# Altium PCB PCB.PcbDoc
Units mm, origin at the board's own origin, x right, y up, seen from the top; angles counter-clockwise.
Board outline 104.7 x 73.4 mm, 2 copper layers (Top Layer, Bottom Layer); 70 components, 62 nets, 213 pads, 16 vias.
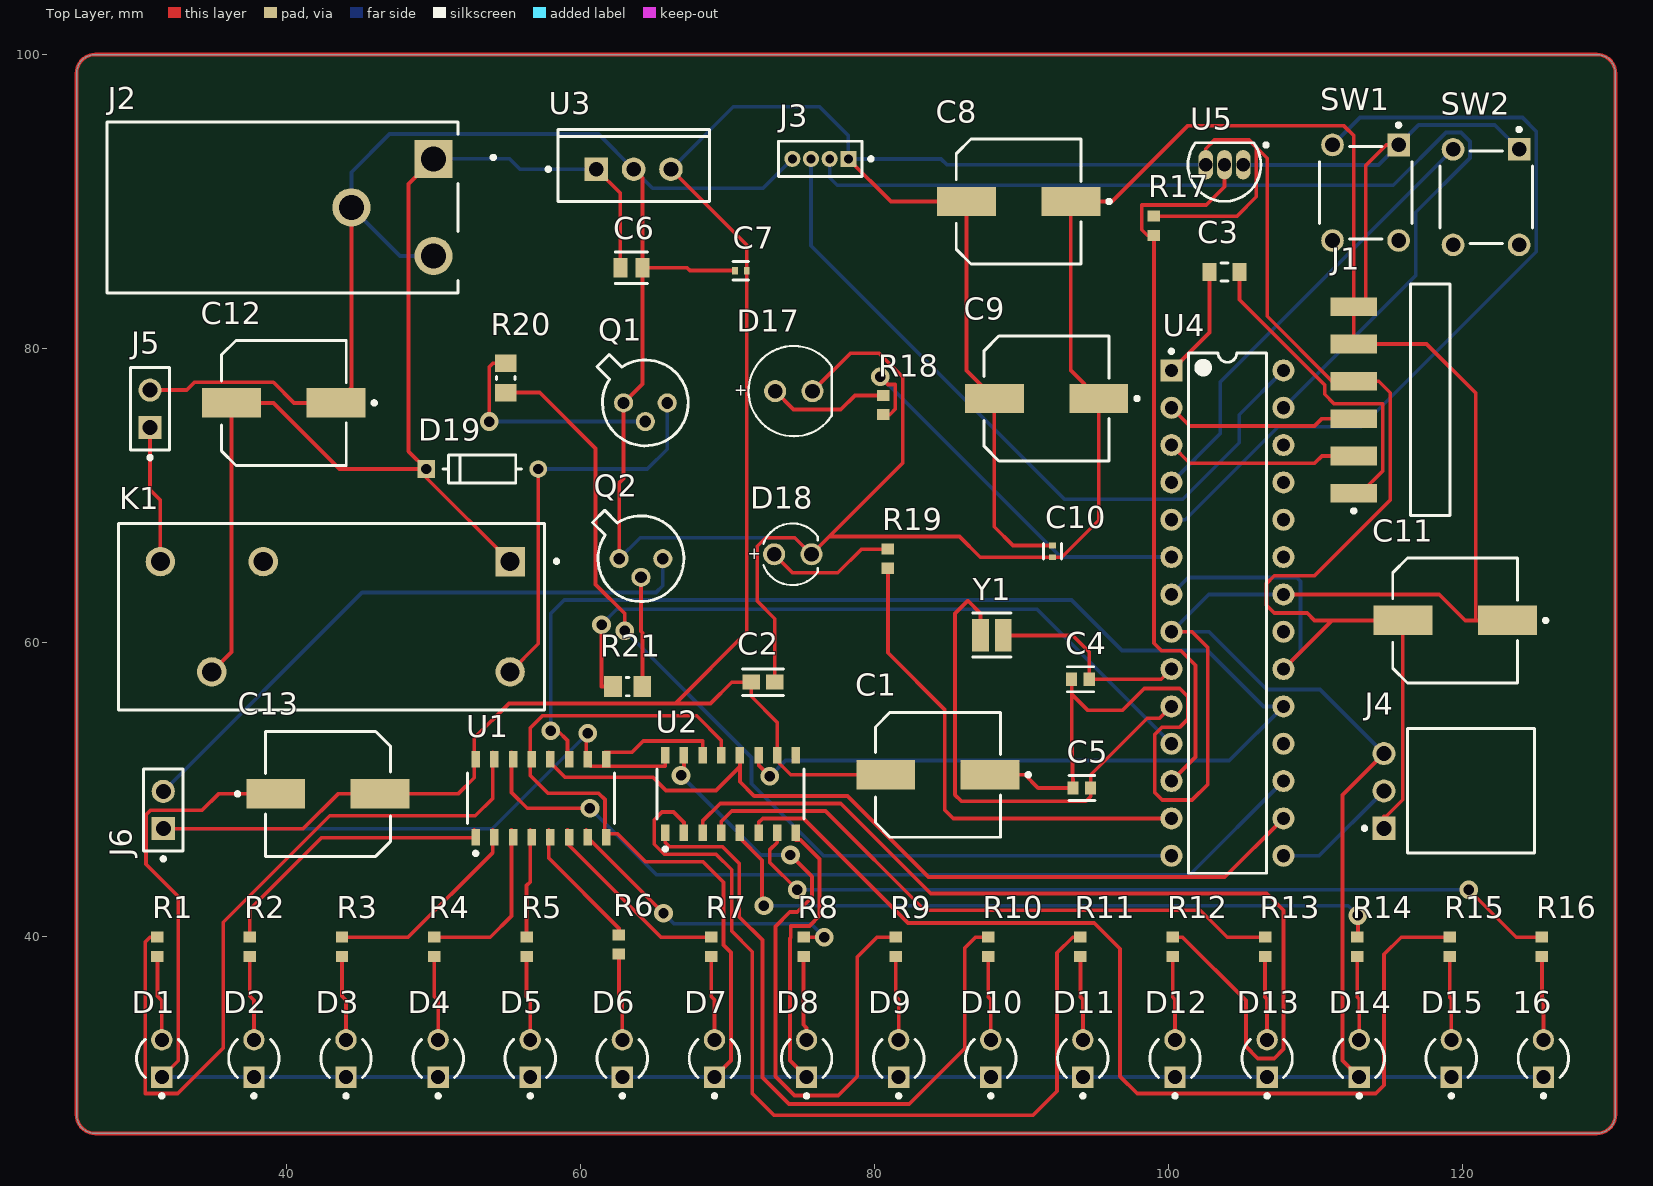
[diagram p0: Top Layer view]
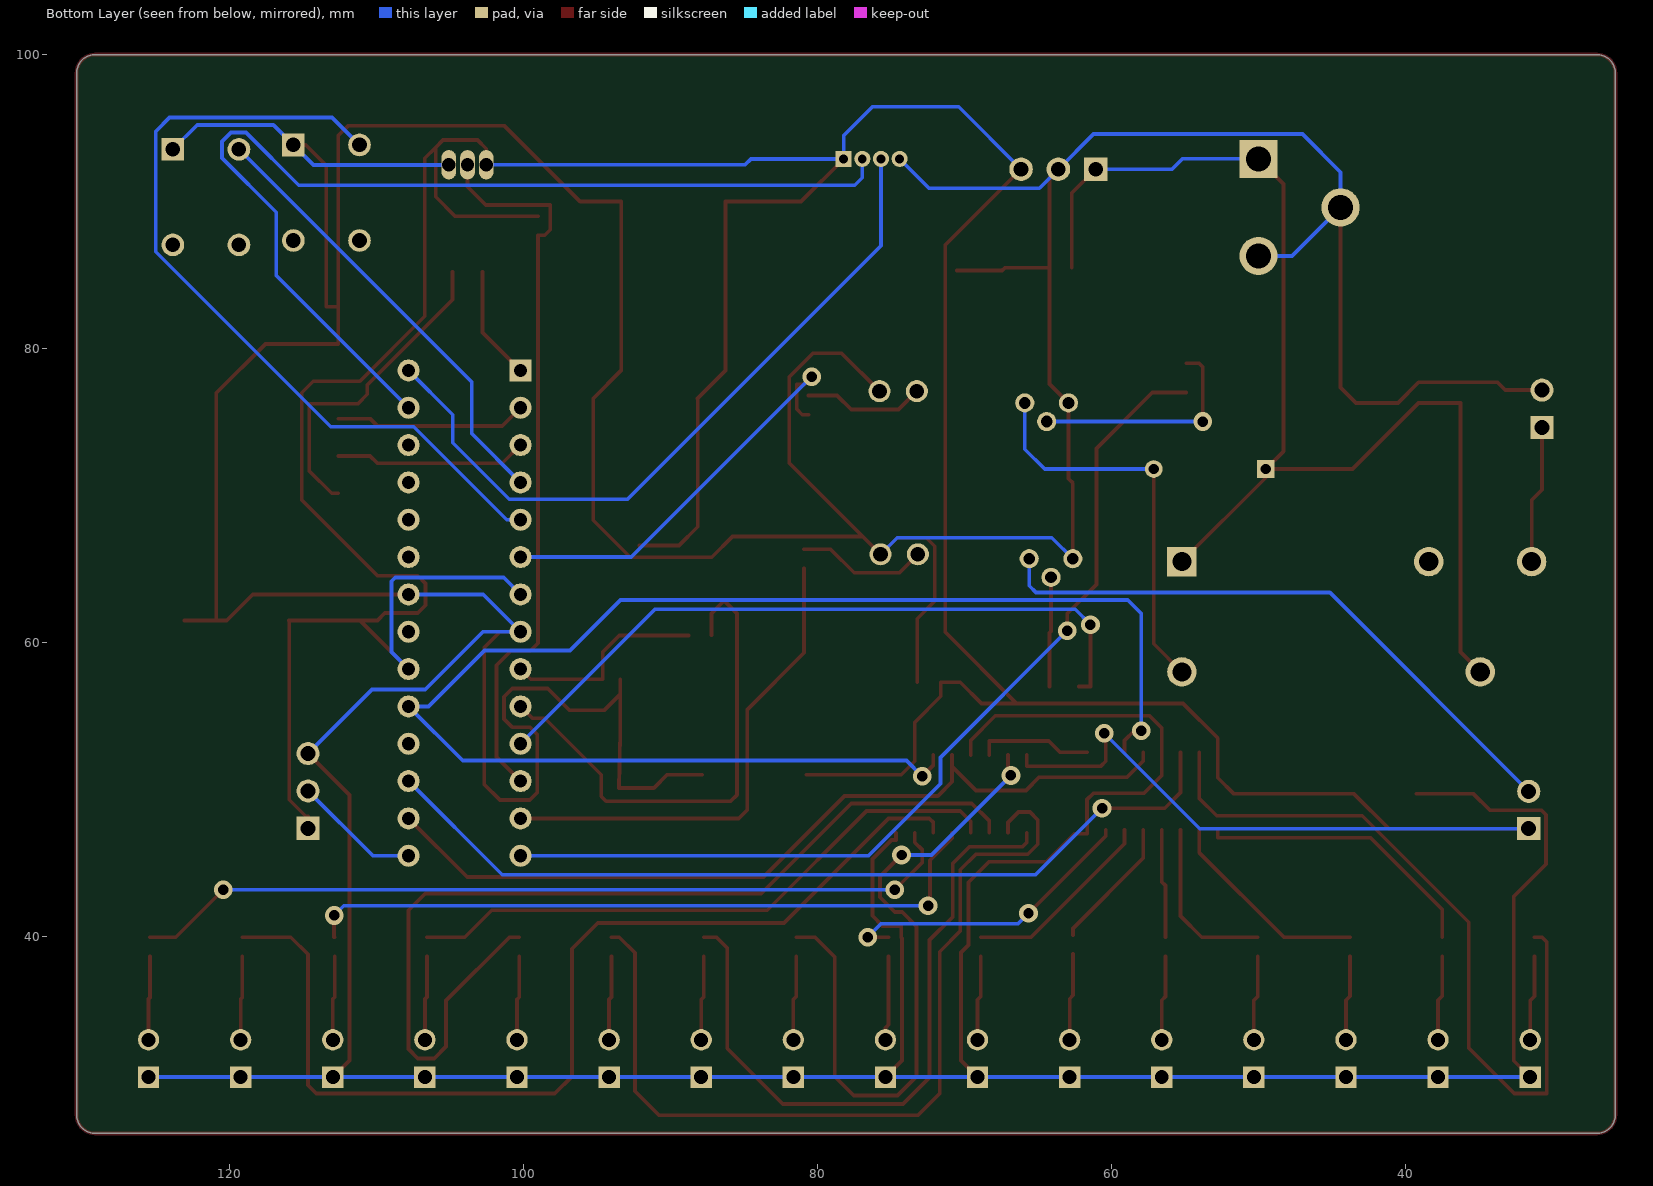
[diagram p1: Bottom Layer view, seen from below]
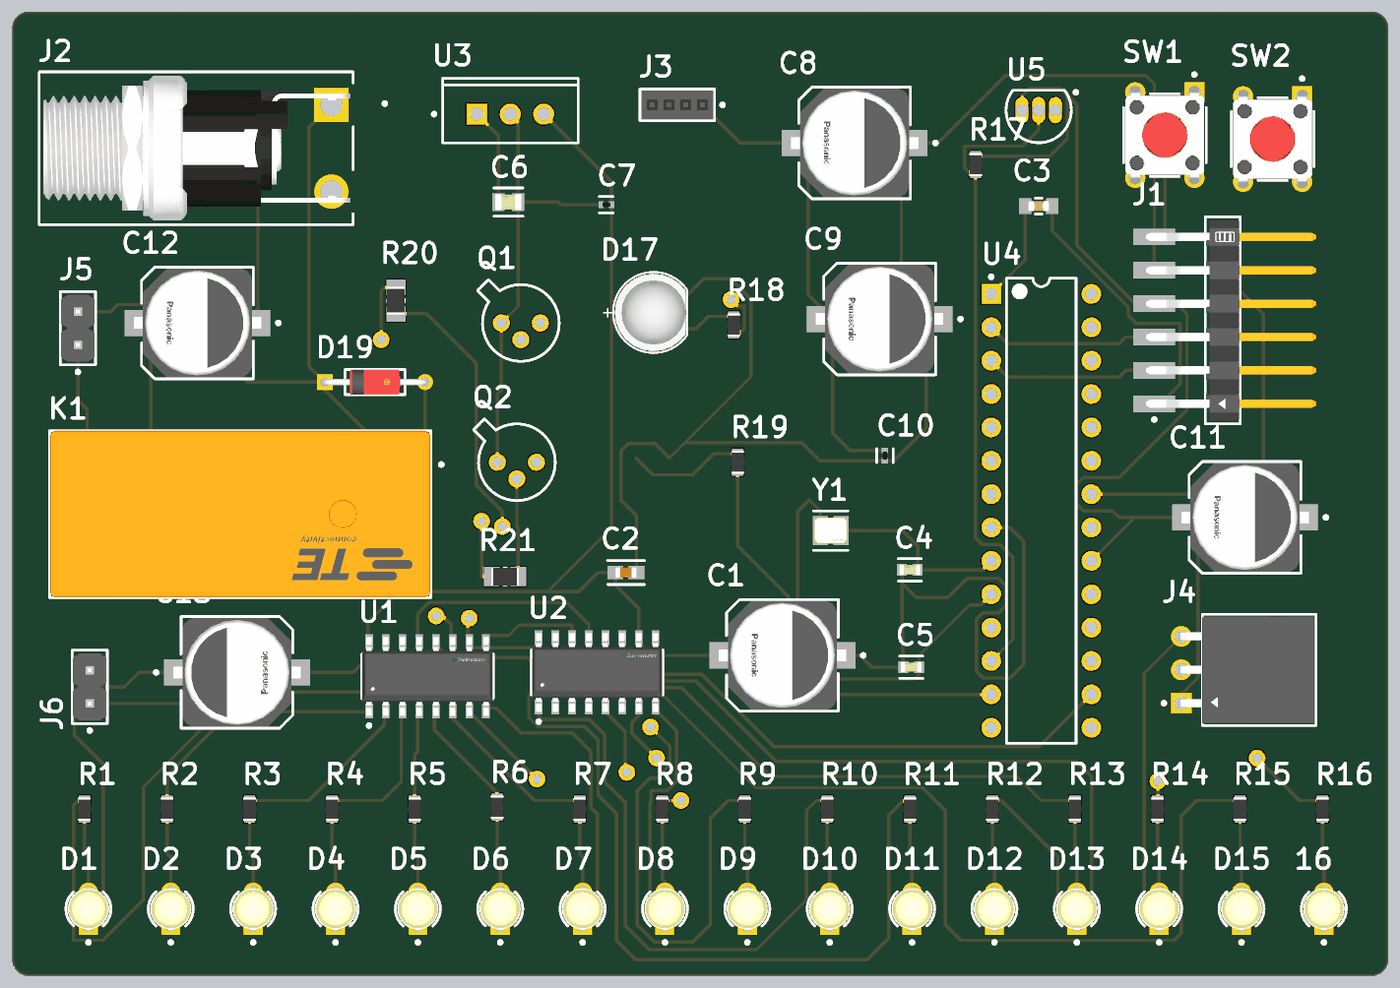
[diagram p2: 3D render of the assembled board from above, using the file's embedded part models]

## Layer stack, top to bottom
Top Solder: solder mask 0.0102, Solder Resist, Dk 3.5
Top Layer: signal copper 0.0356
Dielectric 1: dielectric 0.32, FR-4, Dk 4.8
Bottom Layer: signal copper 0.0356
Bottom Solder: solder mask 0.0102, Solder Resist, Dk 3.5

## Board outline
25.7,27.87 25.7,98.73 cw(c26.97,98.73) 26.97,100 129.13,100 cw(c129.13,98.73) 130.4,98.73 130.4,27.87 cw(c129.13,27.87) 129.13,26.6 26.97,26.6 cw(c26.97,27.87)

## Design rules (kind name [scope] priority, off if disabled: settings)
Clearance [All] p1: gap=0.254 ignorepadtopadclearanceinfootprint=FALSE
PolygonConnect [All] p1: connectstyle=Relief reliefconductorwidth=0.254 reliefentries=4 polygonreliefangle="90 Angle" airgapwidth=0.254
RoutingVias [All] p1: holewidth=0.711 width=1.27 viastyle="Through Hole" minholewidth=0.711 minwidth=1.27 maxholewidth=0.711 maxwidth=1.27
SolderMaskExpansion [All] p1: expansion=0.102 istentingtop=FALSE
SupplyNets "Schematic Supply Nets_3" [InNet('+5V_Main')] p1: voltage=0.000
SupplyNets "Schematic Supply Nets_2" [InNet('+12V_Cooler')] p2: voltage=0.000
SupplyNets "Schematic Supply Nets_1" [InNet('GND')] p3: voltage=0.000
Width [All] p1: maxlimit=0.254 minlimit=0.254 preferedwidth=0.254
30 further rules are at their usual default settings.

## Components (designator, comment, footprint, x,y, rotation, side; value= is the part's Value field where it differs from the comment)
16 "HLMP-1719" FP-HLMP-1719-MFG 125.5,31.7 r90 top
C1 "470uF" FP-FTF-MFG 84.3,51 r180 top
C2 "10uF" FP-GRM188-0_1-e0_2_0_55-IPC_A 72.402,57.3 r0 top
C3 "100nF" FP-CGA3E-0_3-0_1-IPC_A 103.8,85.2 r0 top
C4 "22pF" FP-C0603C-CF-MFG 94,57.5 r0 top value="22 pF"
C5 "22pF" FP-C0603C-CF-MFG 94.1,50.1 r0 top value="22 pF"
C6 "0.33uF" FP-C0805C-DN-MFG 63.45,85.5 r0 top value="0.33 μF"
C7 "0.1uF" FP-GRM15-MFG 70.9,85.3 r0 top value=0.10μF
C8 "470uF" FP-FTF-MFG 89.8,90 r180 top
C9 "470uF" FP-FTF-MFG 91.7,76.6 r180 top
C10 "0.1uF" FP-GRM15-MFG 92.1,66.2 r90 top value=0.10μF
C11 "470uF" FP-FTF-MFG 119.5,61.5 r180 top
C12 "470uF" FP-FTF-MFG 39.8,76.3 r180 top
C13 "470uF" FP-FTF-MFG 42.8,49.7 r0 top
D1 "HLMP-1719" FP-HLMP-1719-MFG 31.5,31.7 r90 top
D2 "HLMP-1719" FP-HLMP-1719-MFG 37.767,31.7 r90 top
D3 "HLMP-1719" FP-HLMP-1719-MFG 44.033,31.7 r90 top
D4 "HLMP-1719" FP-HLMP-1719-MFG 50.3,31.7 r90 top
D5 "HLMP-1719" FP-HLMP-1719-MFG 56.567,31.7 r90 top
D6 "HLMP-1719" FP-HLMP-1719-MFG 62.833,31.7 r90 top
D7 "HLMP-1719" FP-HLMP-1719-MFG 69.1,31.7 r90 top
D8 "HLMP-1719" FP-HLMP-1719-MFG 75.367,31.7 r90 top
D9 "HLMP-1719" FP-HLMP-1719-MFG 81.633,31.7 r90 top
D10 "HLMP-1719" FP-HLMP-1719-MFG 87.9,31.7 r90 top
D11 "HLMP-1719" FP-HLMP-1719-MFG 94.167,31.7 r90 top
D12 "HLMP-1719" FP-HLMP-1719-MFG 100.433,31.7 r90 top
D13 "HLMP-1719" FP-HLMP-1719-MFG 106.7,31.7 r90 top
D14 "HLMP-1719" FP-HLMP-1719-MFG 112.967,31.7 r90 top
D15 "HLMP-1719" FP-HLMP-1719-MFG 119.233,31.7 r90 top
D17 "151051BS04000" WL-TMRC_D5.9H8.7 74.5,77.1 r0 top
D18 "151031SS04000" WL-TMRC_D3.95H5.3 1344.43,1336 r0 top
D19 "1N4148" FP-017AG-MFG 53.3,71.8 r0 top
J1 "GBC06SBSN-M89" FP-GBC06SBSN-M89-MFG 117.8,76.5 r270 top
J2 "L722RA" FP-L722RA-MFG 39.7,89.6 r0 top
J3 "LPPB041NFFN-RC" FP-LPPB041NFFN-RC-MFG 76.305,92.9 r180 top
J4 "PPTC031LGBN-RC" FP-PPTC031LGBN-RC-MFG 120.5,49.9 r90 top
J5 "PEC02SABN" FP-PEC02SABN-MFG 30.7,75.9 r90 top
J6 "PEC02SABN" FP-PEC02SABN-MFG 31.6,48.6 r90 top
K1 "RTB14005" FP-RTB14005-MFG 43.05,61.75 r180 top
Q1 "2N2222" MLTC-TO-18-3 64.4,76.3 r0 top
Q2 "2N2222" MLTC-TO-18-3 64.1,65.7 r0 top
R1 "330" RESC1608X55X30LL15T15 31.2,39.3 r90 top
R2 "330" RESC1608X55X30LL15T15 37.48,39.3 r90 top
R3 "330" RESC1608X55X30LL15T15 43.76,39.3 r90 top
R4 "330" RESC1608X55X30LL15T15 50.04,39.3 r90 top
R5 "330" RESC1608X55X30LL15T15 56.32,39.3 r90 top
R6 "330" RESC1608X55X30LL15T15 62.6,39.45 r90 top
R7 "330" RESC1608X55X30LL15T15 68.88,39.3 r90 top
R8 "330" RESC1608X55X30LL15T15 75.16,39.3 r90 top
R9 "330" RESC1608X55X30LL15T15 81.44,39.3 r90 top
R10 "330" RESC1608X55X30LL15T15 87.72,39.3 r90 top
R11 "330" RESC1608X55X30LL15T15 94,39.3 r90 top
R12 "330" RESC1608X55X30LL15T15 100.28,39.3 r90 top
R13 "330" RESC1608X55X30LL15T15 106.56,39.3 r90 top
R14 "330" RESC1608X55X30LL15T15 112.84,39.3 r90 top
R15 "330" RESC1608X55X30LL15T15 119.12,39.3 r90 top
R16 "330" RESC1608X55X30LL15T15 125.4,39.3 r90 top
R17 "330" RESC1608X55X30LL15T15 99,88.35 r90 top
R18 "330" RESC1608X55X30LL15T15 80.6,76.15 r90 top
R19 "330" RESC1608X55X30LL15T15 80.9,65.7 r90 top
R20 "1k" RESC2013X60X35ML10T20 54.9,78 r90 top
R21 "1k" RESC2013X60X35ML10T20 63.2,57 r0 top
SW1 "1-1825910-5" FP-1-1825910-5-MFG 113.4,90.6 r0 top
SW2 "1-1825910-5" FP-1-1825910-5-MFG 121.6,90.3 r0 top
U1 "MC74HC595ADR2G" FP-751B-05-MFG 57.3,49.4 r90 top
U2 "MC74HC595ADR2G" FP-751B-05-MFG 70.2,49.7 r90 top
U3 "MC7805" ONSC-TO-220-3-221AB-01 63.6,92.2 r90 top
U4 "ATmega328P-PU" 28P3 104,62 r0 top
U5 "DS18B20" Q3+1 103.8,92.5 r90 top
Y1 "16MHz" FP-XRCHA-MFG 87.975,60.5 r0 top

## Footprints (in the part's own frame and the unit in brackets; to place one, negate y for a bottom-side part, rotate by r counter-clockwise, add the part's x,y. Pads: shape width x height; smd on the part's side, far side on the other; paste and mask are expansions set on the pad)
28P3 [mm] "28-Pin Plastic Dual In-Line Package (PDIP)"
  rect 1.5x1.5 hole 0.9: 1(-3.81,16.51)
  round 1.5 hole 0.9: 2(-3.81,13.97) 3(-3.81,11.43) 4(-3.81,8.89) 5(-3.81,6.35) 6(-3.81,3.81) 7(-3.81,1.27) 8(-3.81,-1.27) 9(-3.81,-3.81) 10(-3.81,-6.35) 11(-3.81,-8.89) 12(-3.81,-11.43) 13(-3.81,-13.97) 14(-3.81,-16.51) 15(3.81,-16.51) 16(3.81,-13.97) 17(3.81,-11.43) 18(3.81,-8.89) 19(3.81,-6.35) 20(3.81,-3.81) 21(3.81,-1.27) 22(3.81,1.27) 23(3.81,3.81) 24(3.81,6.35) 25(3.81,8.89) 26(3.81,11.43) 27(3.81,13.97) 28(3.81,16.51)
  silkscreen extent -3.93,-17.7 2.65,17.93, body extent -3.6,-17.65 3.6,17.65, height 4.58
FP-1-1825910-5-MFG [mm]
  rect 1.54x1.54 hole 0.99 paste-2539.97 mask+0: 1(2.25,3.25)
  round 1.54 hole 0.99 paste-2539.97 mask+0: 2(2.25,-3.25) 3(-2.25,3.25) 4(-2.25,-3.25)
  silkscreen extent -3.15,-3.15 3.15,4.72, body extent -3.24,-4.12 3.24,4.12, height 0.25
FP-017AG-MFG [mm]
  rect 1.2x1.2 hole 0.7 paste-2539.97 mask+0: 1(-3.813,0)
  round 1.2 hole 0.7 paste-2539.97 mask+0: 2(3.813,0)
  silkscreen extent -2.68,-0.95 2.68,0.95, body extent -4.51,-1.05 4.51,1.05, height 0.25
FP-751B-05-MFG [mm]
  rect 1.12x0.58 smd paste+0 mask+0: 1(-2.64,4.445) 2(-2.64,3.175) 3(-2.64,1.905) 4(-2.64,0.635) 5(-2.64,-0.635) 6(-2.64,-1.905) 7(-2.64,-3.175) 8(-2.64,-4.445) 9(2.64,-4.445) 10(2.64,-3.175) 11(2.64,-1.905) 12(2.64,-0.635) 13(2.64,0.635) 14(2.64,1.905) 15(2.64,3.175) 16(2.64,4.445)
  silkscreen extent -3.87,-5 1.7,5, body extent -3.3,-5.25 3.3,5.25, height 0.25
FP-C0603C-CF-MFG [mm]
  rect 0.75x0.9 smd paste+0 mask+0: 1(-0.6,0) 2(0.6,0)
  silkscreen extent -0.88,-0.85 0.88,0.85, body extent -1.2,-0.6 1.2,0.6, height 0.25
FP-C0805C-DN-MFG [mm]
  rect 0.95x1.35 smd paste+0 mask+0: 1(-0.75,0) 2(0.75,0)
  silkscreen extent -1.1,-1.08 1.1,1.07, body extent -1.4,-0.85 1.4,0.85, height 0.25
FP-CGA3E-0_3-0_1-IPC_A [mm]
  rect 0.956x1.206 smd paste+0 mask+0: 1(-1.025,0) 2(1.025,0)
  silkscreen extent -0.25,-0.6 0.25,0.6, body extent -2,-1.1 2,1.1, height 0.25
FP-FTF-MFG [mm]
  rect 4x2 smd paste+0 mask+0: 1(-3.55,0) 2(3.55,0)
  silkscreen extent -6.28,-4.25 4.25,4.25, body extent -5.8,-4.5 5.8,4.5, height 0.25
FP-GBC06SBSN-M89-MFG [mm]
  rect 1.27x3.18 smd paste+0 mask+0: 1(6.35,-5.205) 2(3.81,-5.205) 3(1.27,-5.205) 4(-1.27,-5.205) 5(-3.81,-5.205) 6(-6.35,-5.205)
  silkscreen extent -7.87,-5.33 7.87,1.33, body extent -7.98,-6.9 7.98,7.47, height 0.25
FP-GRM15-MFG [mm]
  rect 0.4x0.5 smd paste+0 mask+0: 1(-0.4,0) 2(0.4,0)
  silkscreen extent -0.52,-0.62 0.53,0.63, body extent -0.7,-0.38 0.7,0.38, height 0.25
FP-GRM188-0_1-e0_2_0_55-IPC_A [mm]
  rect 1.208x1.012 smd paste+0 mask+0: 1(-0.802,0) 2(0.802,0)
  silkscreen extent -1.41,-0.91 1.41,0.91, body extent -1.91,-1.01 1.91,1.01, height 0.25
FP-HLMP-1719-MFG [mm]
  rect 1.45x1.45 hole 0.95 paste-2539.97 mask+0: 1(-1.27,0)
  round 1.45 hole 0.95 paste-2539.97 mask+0: 2(1.27,0)
  silkscreen extent -2.67,-1.71 1.3,1.71, body extent -2.22,-2.22 2.22,2.22, height 0.25
FP-L722RA-MFG [mil]
  rect 102.43x102.43 hole 67 paste-99999 mask+0: 1(405,130)
  round 102.43 hole 67 paste-99999 mask+0: 2(185,0) 3(405,-130)
  silkscreen extent -470,-229 570,229, body extent -474,-229 474,229, height 10
FP-LPPB041NFFN-RC-MFG [mm]
  rect 1.1x1.1 hole 0.6 paste-2539.97 mask+0: 1(-1.905,0)
  round 1.1 hole 0.6 paste-2539.97 mask+0: 2(-0.635,0) 3(0.635,0) 4(1.905,0)
  silkscreen extent -3.57,-1.2 2.84,1.2, body extent -2.94,-1.3 2.94,1.3, height 0.25
FP-PEC02SABN-MFG [mm]
  rect 1.57x1.57 hole 1.02 paste-2539.97 mask+0: 1(-1.27,0)
  round 1.57 hole 1.02 paste-2539.97 mask+0: 2(1.27,0)
  silkscreen extent -3.45,-1.33 2.79,1.34, body extent -2.9,-1.44 2.9,1.44, height 0.25
FP-PPTC031LGBN-RC-MFG [mm]
  rect 1.57x1.57 hole 1.02 paste-2539.97 mask+0: 1(-2.54,5.85)
  round 1.57 hole 1.02 paste-2539.97 mask+0: 2(0,5.85) 3(2.54,5.85)
  silkscreen extent -4.24,-4.4 4.24,7.3, body extent -4.34,-4.5 4.34,6.74, height 0.25
FP-RTB14005-MFG [mm]
  round 2 hole 1.3 paste-2539.97 mask+0: 11(8.15,3.75) 12(4.65,-3.75) 14(11.65,-3.75) A2(-12.15,3.75)
  rect 2x2 hole 1.3 paste-2539.97 mask+0: A1(-12.15,-3.75)
  silkscreen extent -15.43,-6.35 14.5,6.35, body extent -14.6,-6.45 14.6,6.45, height 0.25
FP-XRCHA-MFG [mm]
  rect 1.15x2.2 smd paste+0 mask+0: 1(-0.775,0) 2(0.775,0)
  silkscreen extent -1.3,-1.5 1.3,1.5, body extent -1.45,-1.2 1.45,1.2, height 0.25
MLTC-TO-18-3 [mm] "TO-18, 3-Leads"
  round 1.3 hole 0.8: 1(-1.485,0) 2(0,-1.27) 3(1.485,0)
  silkscreen extent -3.29,-2.92 2.92,3.29, body extent -3.29,-2.93 2.93,3.29, height 5.33
ONSC-TO-220-3-221AB-01 [mm] "FM, 3-Leads, Body 10.3x4.85mm, Pitch 2.54mm"
  rect 1.6x1.6 hole 1: 1(0,2.54)
  round 1.6 hole 1: 2(0,0) 3(0,-2.54)
  silkscreen extent -2.18,-5.15 2.72,5.92, body extent -2.16,-5.15 2.69,5.15, height 19.68
Q3+1 [mm] "TO, Flat Index; 3 In-Line, Axial Leads; Body Dia. 4.7mm; Leads 0.56 x 0.51 mm (max)"
  oval 2x1 hole 0.9: 1(0,-1.27) 2(0,0) 3(0,1.27)
  silkscreen extent -2.48,-2.96 1.5,2.48, body extent -2.48,-2.5 1.5,2.5, height 4.96
RESC1608X55X30LL15T15 [mm] "Chip Resistor, 2-Leads, Body 1.75x0.95mm, IPC High Density"
  rect 0.75x0.85 smd: 1(-0.65,0) 2(0.65,0)
  body extent -0.87,-0.48 0.87,0.48, height 0.55
RESC2013X60X35ML10T20 [mm] "Chip Resistor, 2-Leads, Body 2.1x1.35mm, IPC Low Density"
  rect 1.2x1.45 smd: 1(-1,0) 2(1,0)
  silkscreen extent -0.1,-0.63 0.1,0.62, body extent -1.05,-0.68 1.05,0.67, height 0.6
WL-TMRC_D3.95H5.3 [mm] "THT Mono-color Round Color LED, 2-leads"
  round 1.5 hole 1: 1(-1271.27,-1270) 2(-1268.73,-1270)
  silkscreen extent -1272,-1272.1 -1268.31,-1267.9, body extent -1271.99,-1271.97 -1268.37,-1268.03, height 5.35
WL-TMRC_D5.9H8.7 [mm] "THT Mono-color Round Color LED, 2-leads"
  round 1.5 hole 1: 1(-1.27,0) 2(1.27,0)
  silkscreen extent -3.07,-3.07 2.58,3.08, body extent -2.95,-2.95 2.45,2.95, height 9.2

## Part data
16 D1 D2 D3 D4 D5 D6 D7 D8 D9 D10 D11 D12 D13 D14 D15: library part CMP-2000-06410-2, "LED YELLOW DIFFUSED T-1 T/H", Colour=Yellow, Forward Current=2mA, Forward Voltage=1.8V, Manufacturer=Broadcom, Package=0, Power Dissipation=17.5mW, Reverse Voltage=5V, Temperature="-40°C to +100°C", Temperature Range High=+100°C, Temperature Range Low=-40°C, Automotive=No, Category=Diode, ComponentLink2Description=Datasheet, ComponentLink2URL=https://docs.broadcom.com/docs/AV02-1557EN, Device Class L1=Optoelectronics, Device Class L2=LEDs, Device Class L3=unset, Digikey Description="LED YELLOW DIFFUSED T-1 T/H", Lead Free=Yes, Led Orientation=Straight, Luminous Intensity=2.1mcd, Manufacturer Part Number=HLMP-1719, Mouser Description="Standard LEDs - Through Hole Yellow Diffused 585nm 2.1mcd", Octopart=https://octopart.com/hlmp-1719-broadcom-71130405, RoHS=TRUE, Viewing Angle=50°, Wavelength=585nm
C1 C8 C9 C11 C12 C13: library part CMP-05427-000040-1, "CAP ALUM 470UF 20% 25V SMD", Case/Package=Radial, Dielectric Material=Aluminium, ESR (Equivalent Series Resistance)=80mR, Leakage Current=117.5uA, Max Operating Temperature=105°C, Min Operating Temperature=-55°C, Package Quantity=500, Ripple Current=850mA, Tolerance=20%, Voltage=25V, Capacitance=470uF, Construction=Cylindrical, Contact Plating=Tin, Diameter=8mm, Features="General Purpose", Height=10.2mm, Height - Seated (Max)=0.413inch, Lead Diameter=0.9mm, Lead Free="Lead Free", Lead Pitch=3.1mm, Length=10.2mm, Life (Hours)=2000Hour, Mount="Surface Mount", Number of Pins=2, Packaging="Tape and Reel", Radiation Hardening=No, REACH SVHC="No SVHC", Ripple Current (AC)=850mA, RoHS Compliant=Yes, Series=FT, Termination=SMD/SMT, Voltage Rating=25V, Voltage Rating (DC)=25V
C2: library part CMP-2006-02792-2, "Chip Multilayer Ceramic Capacitors for General Purpose, 0603, 10uF, X5R, 15%, 20%, 6.3V", Case Code (Imperial)=0603, Case Code (Metric)=1608, Dielectric=X5R, Max Operating Temperature=85°C, Min Operating Temperature=-55°C, Package Quantity=4000, Tolerance=20%, Voltage=6.3V, Capacitance=10uF, Case/Package=0603, Depth=0.8mm, Height=0.8mm, Lead Free="Lead Free", Length=1.6mm, Material=Ceramic, Mount="Surface Mount", Packaging="Tape and Reel", Radiation Hardening=No, REACH SVHC="No SVHC", Termination=SMD/SMT, Thickness=0.035inch, Voltage Rating=6.3V, Voltage Rating (DC)=6.3V, Width=0.031inch
C3: library part CMP-2000-07546-2, "Cap Ceramic 100nF 50V X7R 10% Pad SMD 0603 +125°C Automotive T/R", Case Code (Imperial)=0603, Case Code (Metric)=1608, Dielectric=X7R, Max Operating Temperature=125°C, Min Operating Temperature=-55°C, Package Quantity=1, Ratings=AEC-Q200, Tolerance=10%, Voltage=50V, Capacitance=100nF, Case/Package=0603, Composition=Ceramic, Depth=0.8mm, Height=0.8mm, Lead Free="Lead Free", Length=1.6mm, Mount="Surface Mount", Packaging="Tape and Reel", Radiation Hardening=No, REACH SVHC="No SVHC", Termination=SMD/SMT, Thickness=0.035inch, Voltage Rating=50V, Voltage Rating (DC)=50V, Weight=7.1E-05oz, Width=0.8mm
C4 C5: library part CMP-2006-03119-3, "Cap Ceramic 22pF 50V C0G 5% SMD 0603 125°C Paper T/R", Capacitance="22 pF", Manufacturer=KEMET, Manufacturer Part Number=C0603C220J5GACTU, Package=C0603C-CF, Temperature="-55°C to +125°C", Temperature Characteristic=C0G, Temperature Coefficient=30ppm/°C, Temperature Range High=+125°C, Temperature Range Low=-55°C, Tolerance=0.05, Voltage Rating="50 V", Automotive=Yes, Automotive Grade="Grade 1", Category=Cap, ComponentLink2Description=Datasheet, ComponentLink2URL=https://api.kemet.com/component-edge/download/datasheet/C0603C100J5GACAUTO.pdf, Device Class L1="Passive Components", Device Class L2=Capacitors, Device Class L3="Ceramic Capacitors", Digikey Description="Cap Ceramic 22pF 50V C0G 5% SMD 0603 125°C Paper T/R", Height=0.87mm, Lead Free=Yes, Material=Ceramic, Mouser Description="Cap Ceramic 22pF 50V C0G 5% SMD 0603 125°C Paper T/R", Octopart=https://octopart.com/c0603c220j5gactu-kemet-98525, RoHS=TRUE
C6: library part CMP-1036-04607-3, "CAP CER 0.33UF 50V X7R 0805", Capacitance="0.33 μF", Manufacturer=KEMET, Manufacturer Part Number=C0805C334K5RACTU, Package=C0805C-DN, Temperature="-55°C to +125°C", Temperature Characteristic=X7R, Temperature Coefficient=30ppm/°C, Temperature Range High=+125°C, Temperature Range Low=-55°C, Tolerance=0.1, Voltage Rating="50 V", Automotive=No, Category=Cap, ComponentLink2Description=Datasheet, ComponentLink2URL=https://content.kemet.com/datasheets/KEM_C1003_C0G_SMD.pdf, Device Class L1="Passive Components", Device Class L2=Capacitors, Device Class L3="Ceramic Capacitors", Digikey Description="CAP CER 0.33UF 50V X7R 0805", Height=0.88mm, Ipc Land Pattern Name=CAPC200125X78, Lead Free=Yes, Material=Ceramic, Mouser Description="Multilayer Ceramic Capacitors MLCC - SMD/SMT 50volts 0.33uF 10% X7R", Octopart=https://octopart.com/c0805c334k5ractu-kemet-10475704, RoHS=TRUE
C7 C10: library part CMP-2100-03641-2, "CAP CER 0.1UF 16V X7R 0402", Capacitance=0.10μF, Manufacturer=Murata, Manufacturer Part Number=GRM155R71C104KA88D, Package=GRM15, Temperature="-55°C to +125°C", Temperature Characteristic=X7R, Temperature Range High=+125°C, Temperature Range Low=-55°C, Tolerance=10%, Voltage Rating=16Vdc, Category=Cap, ComponentLink2Description=Datasheet, ComponentLink2URL=https://search.murata.co.jp/Ceramy/image/img/A01X/G101/ENG/GRM155R71H471KA01-01A.pdf, Device Class L1="Passive Components", Device Class L2=Capacitors, Device Class L3="Ceramic Capacitors", Digikey Description="CAP CER 0.1UF 16V X7R 0402", Height=0.55mm, Ipc Land Pattern Name=CAPC10050X219, Lead Free=yes, Material=Ceramic, Mouser Description="0402 0.1 uF 16V ±10 % Tolerance X7R SMT Multilayer Ceramic Capacitor", Octopart=https://octopart.com/grm155r71c104ka88d-murata-196880, RoHS=TRUE, Standoff Height=0mm
D17: library part CMP-1488-00009-2, Case/Package=Radial, Color=Blue, Forward Current=100mA, Forward Voltage=3.2V, Max Operating Temperature=85°C, Max Reverse Voltage (DC)=5V, Min Operating Temperature=-40°C, Test Current=20mA, Dominant Wavelength=470nm, Height=8.6mm, Length=5mm, Lens Size=5mm, Lens Style="Circular, Diffused, Round", Luminous Intensity=500mcd, Mount="Through Hole", NexarPartId=29717812, Packaging=Bulk, Peak Wavelength=465nm, REACH SVHC=Unknown, RoHS=Compliant, Viewing Angle=40°, Wavelength=470nm, Width=5mm
D18: library part CMP-1488-00005-2, Case/Package=Radial, Color=Red, Forward Current=100mA, Forward Voltage=2V, Max Operating Temperature=85°C, Max Reverse Voltage (DC)=5V, Min Operating Temperature=-40°C, Test Current=20mA, Dominant Wavelength=635nm, Height=5.3mm, Length=3mm, Lens Size=3mm, Lens Style="Circular, Diffused, Round", Luminous Intensity=160mcd, Mount="Through Hole", NexarPartId=29717802, Packaging=Bulk, Peak Wavelength=640nm, REACH SVHC=Unknown, RoHS=Compliant, Viewing Angle=40°, Wavelength=635nm, Width=3mm
D19: library part CMP-07163-000046-1, "DIODE GEN PURP 100V 200MA DO35", Average Rectified Current=200mA, Capacitance=4pF, Case/Package=DO-35, Current=4A, Forward Current=300mA, Forward Voltage=1V, Max Forward Surge Current (Ifsm)=1A, Max Operating Temperature=175°C, Max Power Dissipation=500mW, Max Repetitive Reverse Voltage (Vrrm)=100V, Max Reverse Current=5uA, Min Operating Temperature=-65°C, Package Quantity=2000, Contact Plating=Tin, Current Rating=200mA, Diameter=1.91mm, Element Configuration=Single, Height=4.56mm, Lead Free="Lead Free", Length=4.56mm, Max Reverse Voltage (DC)=100V, Max Surge Current=4A, Mount="Through Hole", Number of Pins=2, Output Current=200mA, Outside Diameter=1.85mm, Packaging=Bulk, Peak Non-Repetitive Surge Current=4A, Polarity=Standard, Power Dissipation=500mW, Radiation Hardening=No, REACH SVHC="No SVHC", Recovery Time=4ns, Reverse Recovery Time=4ns, Reverse Voltage=100V, Series=-, Voltage=100V, Voltage Rating (DC)=100V, Weight=0.01lb, Width=1.91mm
J1: library part CMP-25680-000080-1, "CONN HEADER SMD R/A 6POS 2.54MM", Color=Black, Package Quantity=1, Connector Type="Male Pin", Contact Material=Bronze, Contact Mating Length=0.23inch, Contact Plating=Gold, Contact Type="Male Pin", Gender=Male, Height=3.56mm, Housing Color=Black, Housing Material=Plastic, Lead Free="Lead Free", Length=15.2mm, Mount="Surface Mount", Number of Contacts=6, Number of Positions=6, Number of Rows=1, Packaging=Bulk, Pitch=0.1inch, RoHS Compliant=Yes, Termination=Solder, Width=2.54mm
J2: library part CMP-47995-000001-1, "CONN POWER JACK 2.1MM ID SOLDER", Current Rating=5A, Manufacturer=Switchcraft, Voltage Rating=12V, Automotive=No, Category=Conn, ComponentLink2Description=Datasheet, ComponentLink2URL=http://www.switchcraft.com/Drawings/7__RA_SERIES-7__RAH_SERIES_CD.PDF, Conn Gender=Male, Conn Orientation="Right Angle", Contact Material=Silver, Device Class L1=Connectors, Device Class L2="Power Connectors", Device Class L3=unset, Digikey Description="CONN POWER JACK 2.1MM ID SOLDER", Height=0.57inch, Lead Free=Yes, Manufacturer Part Number=L722RA, Mouser Description="DC Power Connectors R/A PC TERMINALS LONG BUSHING", Number of Contacts=3, Octopart=https://octopart.com/l722ra-switchcraft-28281, Package=L722RA, Pitch=3.302mm, RoHS=TRUE, Shielding=true
J3: library part CMP-25680-000035-1, "CONN HDR 4POS 0.05 GOLD PCB", Package Quantity=1, Connector Type=Header, Contact Plating=Gold, Contact Type="Female Socket", Lead Free="Lead Free", Mount="Through Hole", Number of Positions=4, Number of Rows=1, Packaging=Bulk, Pitch=0.05inch, RoHS Compliant=Yes, Termination=Solder
J4: library part CMP-00595-00270343-2, "PPTC031LGBN-RC Fixed Resistor, Metal Film, 1W, 10000ohm, 350V, 5% +/-Tol, 250ppm/Cel, Through Hole Mount", Color=Black, Current Rating=3A, Max Operating Temperature=105°C, Min Operating Temperature=-40°C, Connector Type="Header, Socket", Contact Material=Bronze, Contact Plating=Tin, Gender=Female, Height=2.4mm, Housing Color=Black, Housing Material=Plastic, Lead Free="Lead Free", Length=8.12mm, Mount="Through Hole", NexarPartId=270343, Number of Positions=3, Number of Rows=1, Packaging=Bulk, Pitch=2.54mm, RoHS=Compliant, Termination=Solder, Width=8.5mm
J5 J6: library part CMP-25680-000076-1, "CONN HEADER VERT 2POS 2.54MM", Color=Black, Flammability Rating="UL94 V-0", Max Operating Temperature=125°C, Min Operating Temperature=-65°C, Package Quantity=1, Connector Type="Male Pin", Contact Finish - Mating=TIN, Contact Material=Bronze, Contact Mating Length=0.23inch, Contact Plating=Tin, Contact Shape=Square, Contact Type="Male Pin", Fastening Type=Pull, Gender=Male, Height=2.54mm, Housing Color=Black, Housing Material=Plastic, Insulation Color=Black, Insulation Material=PBT, Lead Free="Lead Free", Length=5.08mm, Mount="Through Hole", Number of Contacts=2, Number of Positions=2, Number of Rows=1, Packaging=Bulk, Pitch=0.1inch, RoHS Compliant=Yes, Series=-, Termination=Solder, Width=2.54mm
K1: library part CMP-03395-000207-1, "RELAY GEN PURPOSE SPDT 12A 5V", Coil Current=80mA, Coil Power=500mW, Coil Resistance=62R, Coil Voltage (DC)=5V, Contact Current Rating=12A, Contact Voltage Rating (AC)=250V, Dropout Voltage=500mV, Max Operating Temperature=85°C, Max Voltage Rating (AC)=400V, Min Operating Temperature=-40°C, Package Quantity=500, Application(s)=POWER, Coil Type=Non-Latching, Contact Material=Silver, Depth=12.7mm, ELV=Compliant, Height=15.7mm, Lead Free="Lead Free", Length=29mm, Mount=Socket, Number of Pins=5, Operate Time=8ms, Packaging=Carton, Radiation Hardening=No, Relay Type="General Purpose", Release Time=6ms, RoHS Compliant=Yes, Series="RT1, SCHRACK", Termination=Plug, Throw Configuration=SPDT, Weight=0.494oz, Width=12.7mm
Q1 Q2: library part CMP-2000-05237-1, "Low Power Bipolar NPN Transistor, 30 V, -65 to 200 degC, 3-Pin TO-18, RoHS, Bulk", Collector Emitter Voltage V(br)ceo=30V, Collector Emitter Voltage Vces=400mV, Continuous Collector Current Ic Max=800mA, Current Ic @ Vce Sat=150mA, DC Current Gain hFE=100, Full Power Rating Temperature=25degC, Manufacturer=Multicomp, Package / Case=TO-18, Package Description="3-Pin Transistor Outline Package (TO-18), Dia 5.54 mm, Pitch Pitch 1.485mm", Package Reference=TO-18-3, Power Dissipation Pd=500mW, Voltage Vcbo=60V, Current Ic Continuous a Max=800mA, Current Ic hFE=150mA, Datasheet URL=http://www.farnell.com/datasheets/1662272.pdf, Datasheet Version="Rev. 1.1, 05/2012", DC Collector Current=800mA, Gain Bandwidth ft Min=250MHz, Gain Bandwidth ft Typ=250MHz, Hfe Min=100, Manufacturer URL=http://uk.farnell.com/b/multicomp, No. of Pins=3, No. of Transistors=1, Pin Configuration=a, Power Dissipation Ptot Max=500mW, SVHC=NoSVHC(19-Dec-2012), Transistor Case Style=TO-18, Transistor Polarity=NPN
R1 R2 R3 R4 R5 R6 R7 R8 R9 R10 R11 R12 R13 R14 R15 R16 R17 R18 R19: library part CMP-2000-00435-2, "Chip Resistor, 330 Ohm, +/- 1%, 0.1 W, -55 to 155 degC, 0603 (1608 Metric), RoHS, Tape and Reel", Current Rating="500 mA", Max Operating Temperature="85 degC", Min Operating Temperature="-25 degC", Package Quantity=1500, Voltage Rating="10 V", ComponentLink1Description="Manufacturer URL", ComponentLink1URL=http://www.panasonic.com/, ComponentLink2Description=Datasheet, ComponentLink2URL=http://industrial.panasonic.com/cdbs/www-data/pdf/RDA0000/AOA0000C86.pdf, Contact Finish=Gold, Contact Material=Copper, Contact Plating=Gold, DatasheetVersion=Apr-15, Gender=Male, Height="1.45 mm", Lead Pitch="1.1 mm", Length="13.7 mm", Mating Cycles=10000, Mount="Surface Mount", PackageDescription="2-Pin Surface Mount Device, Body 1.6 x 0.85 mm", PackageReference=0603, Packaging="Tape and Reel", Pins=8, REACH SVHC="No SVHC", RoHSCompliant=true, Width="1.45 mm"
R20 R21: library part CMP-2100-03671-1, "Chip Resistor, 1 KOhm, +/- 1%, 125 mW, -55 to 155 degC, 0805 (2012 Metric), RoHS, Tape and Reel", Case Code (Imperial)=0805, Case Code (Metric)=2012, Manufacturer=Yageo, Max Operating Temperature=155degC, Max Power Dissipation=125mW, Min Operating Temperature=-55degC, Package Description="2-Pin Surface Mounted Device, Body 2 x 1.25 mm", Package Quantity=1, Resistance=1KOhm, Temperature Coefficient=100ppm/degreesC, Tolerance=1%, Voltage Rating=150V, Case/Package=0805, Composition=ThickFilm, Datasheet URL=http://www.yageo.com/NewPortal/yageodocoutput?fileName=/pdf/R-Chip/PYu-RC_Group_51_RoHS_L_5.pdf, Datasheet Version="Rev. 5, 10/2016", Depth=1.25mm, Height=0.024inch, Lead Free=LeadFree, Length=0.079inch, Manufacturer URL=http://www.yageo.com/, Military Standard=Not, Number of Pins=2, Number of Terminations=2, Package Reference=0805, Packaging=TapeandReel, Power Rating=125mW, REACH SVHC=Unknown, RoHSCompliant=true, Termination=SMD/SMT, Voltage Rating (DC)=150V, Width=0.049inch
SW1 SW2: library part CMP-03407-000006-1, "SWITCH TACTILE SPST-NO 0.05A 24V", Actuator Color=Red, Contact Current Rating=50mA, Contact Resistance=100mR, Max Operating Temperature=85°C, Max Voltage Rating (DC)=24V, Min Operating Temperature=-35°C, Operating Force=2.55N, Package Quantity=750, Actuator Length=5.9mm, Actuator Material=PBT, Actuator Type=Standard, Contact Material=Brass, Contact Plating=Silver, Electrical Life=100000Cycles, Illumination Type=Non-Illuminated, Length=5.99mm, Max Current Rating=50mA, Mechanical Life=100000Cycles, Mount="Through Hole", Orientation=Straight, Packaging="Loose Piece", Radiation Hardening=No, RoHS Compliant=Yes, Series="FSMJ, Alcoswitch", Switch Function=Off-Mom, Switch Travel=0.25mm, Termination="PC Pins", Throw Configuration=SPST, Type=Switch, Voltage Rating (DC)=24V
U1 U2: library part CMP-07115-000002-1, "IC SHIFT REGISTR 8BIT 3ST 16SOIC", Ambient Temperature Range High=+125°C, Ambient Temperature Range Low=-55°C, Frequency=35MHz, Manufacturer="On Semiconductor", Max Supply Voltage=6V, Min Supply Voltage=2V, Nominal Supply Current=40uA, Package=751B-05, Temperature="-55°C to +125°C", Automotive=No, Category=IC, ComponentLink2Description=Datasheet, ComponentLink2URL=https://www.onsemi.com/pub/Collateral/MC74HC595A-D.PDF, Device Class L1="Integrated Circuits (ICs)", Device Class L2="Logic ICs", Device Class L3="Shift Registers", Digikey Description="IC SHIFT REGISTR 8BIT 3ST 16SOIC", Footprint Url=https://www.onsemi.com/pub/Collateral/751B-05.PDF, Height=1.75mm, Ipc Land Pattern Name=SOIC127P600X155-16, Lead Free=Yes, Logic Function Desc="Serial to Parallel", Manufacturer Part Number=MC74HC595ADR2G, Mouser Description="Counter Shift Registers 8-Bit 3 State Shift", Number Of Circuits=1, Number Of Inputs=1, Number Of Outputs=8, Octopart=https://octopart.com/mc74hc595adr2g-on+semiconductor-112155, Quiescent Current=40uA, RoHS=TRUE, Standoff Height=0.1mm, Temperature Range High=+125°C, Temperature Range Low=-55°C
U3: library part CMP-2000-04928-1, "Positive Voltage Regulator, 1 A, 5 V, 0 to 125 degC, 3-Pin TO-220, RoHS, Tube", Current, Output, Maximum=1A, Current, Quiescent Supply=6.5mA, Current, Supply=3.2mA, Dropout Voltage=2V, Manufacturer="ON Semiconductor", Package Description="3-Pin Flange Mount, Vertical Straight Lead, Body 9.97 x 4.445 mm, Pitch 2.54 mm", Package Reference=TO-220-3-221AB-01, Package Type=TO-220, Package Version="Rev. A, 11/2010", Resistance, Thermal, Junction to Case=5degC/W, Temperature, Operating, Maximum=+125degC, Temperature, Operating, Minimum=0degC, Temperature, Operating, Range=0to+125degC, Voltage, Input Range=Maximumof35V, Voltage, Input, High Level=35V, Voltage, Noise=10μV/V, Voltage, Output=5V, Datasheet URL=http://www.onsemi.com/pub_link/Collateral/MC7800-D.PDF, Datasheet Version="Rev. 27, 11/2014", Dimensions=10.28x4.82x15.75mm, Dropout Voltage Measurement Current=1A, Height=15.75mm, Length=10.28mm, Line Regulation=20mV, Load Regulation=25mV, Manufacturer URL=http://www.onsemi.com/, Mounting Type=ThroughHole, Number Of Outputs=1, Number of Pins=3, Output Type=Fixed, Polarity=Positive, Regulation, Line=0.5mV, Regulation, Load=1.3mV, Regulator Function=Standard, Regulator Type=PositiveVoltageOut, Type=VoltageRegulator, Voltage, Dropout=2V, Voltage, Supply=35V, Width=4.82mm
U4: library part CMP-0095-00013-2, "8-bit AVR Microcontroller, 32KB Flash, 1KB EEPROM, 2KB SRAM, 28-pin PDIP, Industrial Grade (-40°C to 85°C)", ComponentLink1Description="Manufacturer URL", ComponentLink1URL=http://www.atmel.com/, ComponentLink2Description="ATmega48A/48PA/88A/88PA/168A/168PA/328/328P Datasheet", ComponentLink2URL=http://www.atmel.com/dyn/resources/prod_documents/8271.pdf, ComponentLink3Description="ATmega48A/48PA/88A/88PA/168A/168PA/328/328P Summary", ComponentLink3URL=http://www.atmel.com/dyn/resources/prod_documents/8271S.pdf, DatasheetVersion="revD, May-2011", PackageDescription="28-lead (0.300\"/7.62mm Wide) Plastic Dual Inline Package (PDIP)", PackageReference=28P3, PackageVersion="revB, Sep-2001", RevisionNote="DatasheetVersion updated. URLs added."
U5: library part CMP-0253-00003-1, "Programmable Resolution Digital Thermometer, 1-Wire Interface, ±0.5°C Accuracy, 3-Pin TO92, -55°C to +125°C, Pb-Free", Code_JEDEC=TO-226-AA, ComponentLink1Description="Manufacturer URL", ComponentLink1URL=http://www.maxim-ic.com, ComponentLink2Description=Datasheet, ComponentLink2URL=http://datasheets.maxim-ic.com/en/ds/DS18B20.pdf, DatasheetVersion=2007, PackageDescription="TO-92 Package, Body Dia. 4.7mm; Leads 0.51 x 0.51 mm (max), Pb-Free", PackageReference=Q3+1, PackageVersion="revB, 2009"
Y1: library part CMP-06054-000011-1, "CRYSTAL 16.0000MHZ 8PF SMD", Case/Package=SMD/SMT, ESR (Equivalent Series Resistance)=100R, Frequency Stability=100ppm, Load Capacitance=8pF, Max Operating Temperature=125°C, Min Operating Temperature=-40°C, Package Quantity=3000, Ratings=AEC-Q200, Frequency=16MHz, Frequency Tolerance=100ppm, Height=0.031inch, Lead Pitch=1.45mm, Length=0.098inch, Mount="Surface Mount", Packaging="Tape and Reel", Termination=SMD/SMT, Tolerance=100ppm, Weight=0.000459oz, Width=0.079inch

## Via types
v1: diameter 1.27, hole 0.711, Top Layer to Bottom Layer, 16 vias

## Nets (pads, with @x,y where several pads share a name; then routed paths per layer and width w, separated by ;. In a path a pad name is that pad's centre, name@x,y a point inside that pad or via, vN(x,y) a via of type N, cw(c..) or ccw(c..) an arc to the next point about the centre after c; other vN are vias at no path point)
+5V_Main: C1.2 C2.1 C7.2 C8.2 C9.2 C10.2 C11.2 C13.2 J1.4 J3.1 J4.1 J6.1 R17.2 U1.10 U1.16 U2.10 U2.16 U3.3 U4.7 U4.20 U5.3 | length 319.9
  Top Layer w0.254: J6.1 41.115,47.33 43.485,49.7 C13.2 51.655,49.7 52.755,50.8 52.755,52.54 52.755,53.492 55.117,55.855 66.446,55.855 ; v1(60.477,53.823) 60.375,53.72 60.375,52.54 60.375,51.918 60.706,51.587 65.755,51.587 U2.16 ; U3.3 71.3,87.04 C7.2 71.3,60.708 66.446,55.855 ; J3.1 81.11,90 C8.2 86.25,78.5 C9.2 88.138,76.6 88.138,67.87 89.408,66.6 C10.2 ; C1.2 74.293,51 73.375,51.918 U2.10 73.375,54.562 71.6,56.337 C2.1 70.279,57.3 68.834,55.855 66.446,55.855 ; R17.2 104.648,89 105.969,90.321 105.969,93.675 ; U5.3 102.53,93.589 103.124,94.183 105.461,94.183 105.969,93.675 ; U4.20 111.12,61.5 ; J4.1 114.65,48.184 114.808,48.184 115.926,49.301 C11.2@115.926,61.5 ; C11.2 C11.2@115.926,61.5 ; 105.969,93.675 106.705,92.939 106.705,82.19 111.125,77.77 J1.4 114.3,77.77 115.074,76.996 115.074,69.684 109.931,64.541 107.188,64.541 106.655,64.008 106.655,62.535 107.188,62.001 109.43,62.001 109.931,61.5 111.12,61.5 ; 111.12,61.5 C11.2@115.926,61.5
  Bottom Layer w0.254: J6.1 53.985,47.33 v1(60.477,53.823) ; U3.3 70.384,96.444 76.254,96.444 78.21,94.488 J3.1 84.519,92.9 84.912,92.507 102.53,92.507 U5.3 ; U4.7 101.334,64.414 108.712,64.414 108.966,64.16 108.966,59.346 U4.20
+12V_Cooler: C6.1 C12.2 D19.1 J2.1 K1.11 K1.A1 U3.1 | length 83.7
  Top Layer w0.254: K1.11 36.25,59.35 C12.2 39.092,76.3 43.592,71.8 D19.1 ; J2.1 48.285,91.2 48.285,73.002 D19.1 ; K1.A1 49.487,71.213 D19.1 ; U3.1 62.7,90.56 C6.1
  Bottom Layer w0.254: J2.1 55.169,92.902 55.871,92.2 U3.1
"Blue LED": R18.1 U4.6 | length 28.8
  Top Layer w0.254: v1(80.391,78.08) 80.915,77.556 81.406,77.556 81.406,75.88 81.026,75.5 R18.1
  Bottom Layer w0.254: v1(80.391,78.08) 92.661,65.81 U4.6
Clock: U1.11 U2.11 U4.19 | length 102.1
  Top Layer w0.254: v1(57.963,54) 58.445,54 59.105,53.34 U1.11@59.105,52.54 ; U2.11 72.105,51.669 v1(72.873,50.902)
  Bottom Layer w0.254: v1(57.963,54) 57.963,61.976 58.878,62.891 93.395,62.891 96.825,59.461 102.64,59.461 106.451,55.65 U4.19 104.128,51.968 73.939,51.968 v1(72.873,50.902)
Cooler: R20.1 U4.14 | length 65.5
  Top Layer w0.254: R20.1 57.214,77 61.011,73.203 61.011,63.946 62.992,61.965 v1(62.992,60.808)
  Bottom Layer w0.254: v1(62.992,60.808) 71.628,52.172 71.628,50.383 76.521,45.49 U4.14
Data: U1.14 U4.17 | length 60.2
  Top Layer w0.254: U1.14@55.295,52.54 55.295,49.784 56.362,48.717 v1(60.63,48.717)
  Bottom Layer w0.254: v1(60.63,48.717) 65.151,44.196 101.436,44.196 U4.17
GND: 16.1 C1.1 C2.2 C4.1 C5.1 C6.2 C7.1 C8.1 C9.1 C10.1 C11.1 C12.1 C13.1 D1.1 D2.1 D3.1 D4.1 D5.1 D6.1 D7.1 D8.1 D9.1 D10.1 D11.1 D12.1 D13.1 D14.1 D15.1 D17.2 D18.2 J1.5 J1.6 J2.2 J2.3 J3.4 J4.3 J5.2 Q1.1 Q2.1 SW1.1 SW2.1 U1.8 U1.13 U2.8 U2.13 U3.2 U4.8 U4.22 U5.1 | length 597.2
  Top Layer w0.254: J5.2 33.198,77.17 33.726,77.699 39.091,77.699 40.489,76.3 C12.1 44.399,77.349 J2.2 ; D1.1 32.614,31.544 32.614,42.723 30.429,44.907 30.429,48.285 30.734,48.59 34.239,48.59 35.349,49.7 C13.1 ; 61.645,47.701 61.645,47.26 61.645,46.99 62.509,46.99 64.414,45.085 68.326,45.085 69.723,43.688 69.723,39.421 70.231,38.913 70.231,31.561 D7.1 ; 61.646,47.701 61.646,49.317 61.214,49.749 57.768,49.749 56.565,50.952 56.565,52.54 56.565,54.177 57.404,55.016 67.889,55.016 69.565,53.34 U2.13 ; Q2.1 62.615,70.841 62.915,71.141 Q1.1 64.2,77.585 C6.2 ; U3.2 64.2,91.6 C6.2 ; C7.1 67.434,85.3 67.234,85.5 C6.2 ; C2.2 73.204,61.619 72.009,62.814 72.009,66.548 72.593,67.132 74.568,67.132 D18.2 76.908,67.208 ; U2.8 74.645,46.558 74.955,46.558 76.251,45.263 76.251,41.402 75.56,40.711 74.295,40.711 74.295,39.91 74.244,39.859 74.244,31.552 D8.1 ; D17.2 78.35,79.68 80.298,79.68 81.914,78.064 81.914,72.214 76.908,67.208 ; C1.1 90.221,51 91.121,50.1 C5.1 93.4,53.846 93.4,56.485 ; C4.1 93.4,56.485 ; U4.8 101.6,60.73 102.667,59.663 102.667,50.343 101.6,49.276 99.567,49.276 99.059,49.784 99.059,53.732 99.568,54.241 100.765,54.241 101.321,54.797 101.321,56.311 100.762,56.871 98.349,56.871 96.876,55.397 94.488,55.397 93.4,56.485 ; U4.22 118.416,63.27 120.186,61.5 120.904,61.5 ; D14.1 111.836,31.56 111.836,49.626 J4.3 ; SW1.1 114.808,93.85 113.411,92.453 113.411,82.85 J1.6@112.598,82.85 ; C11.1 120.904,61.5 ; 76.908,67.208 85.776,67.208 87.184,65.8 C10.1 92.735,65.8 95.25,68.315 C9.1 93.35,78.5 C8.1 96.139,90 101.287,95.148 111.938,95.148 112.598,94.488 J1.6@112.598,82.85 ; J1.6@112.598,82.85 J1.6 J1.5 117.551,80.31 120.904,76.957 120.904,61.5
  Bottom Layer w0.254: D1.1 D2.1 D3.1 D4.1 D5.1 D6.1 D7.1 D8.1 D9.1 D10.1 D11.1 D12.1 D13.1 D14.1 D15.1 16.1 ; J2.3 47.701,86.298 J2.2 44.399,91.999 46.99,94.59 61.21,94.59 U3.2 64.893,90.907 72.407,90.907 J3.4 ; Q2.1 64.047,67.132 74.568,67.132 D18.2 ; U5.1 105.07,92.481 114.281,92.481 SW1.1 117.009,95.209 122.191,95.209 SW2.1 ; U4.22 102.73,63.27 U4.8 102.744,60.73 106.68,56.794 110.296,56.794 J4.3
Latch: U1.12 U2.12 U4.16 | length 58.2
  Top Layer w0.254: U1.12@57.835,52.54 57.835,51.918 58.928,50.825 64.912,50.825 65.808,49.93 69.209,49.93 70.835,51.556 ; U2.12 70.835,51.556 ; U4.16 103.824,44.044 83.668,44.044 78.156,49.555 71.8,49.555 70.835,50.521 70.835,51.556
"LED Button": SW2.3 U4.4 | length 30.6
  Bottom Layer w0.254: U4.4 103.52,74.22 103.52,77.72 SW2.3
Net16_2: 16.2 R16.1 | length 5.7
  Top Layer w0.254: R16.1 125.4,35.838 125.5,35.738 16.2
NetC3_2: C3.2 J1.1 | length 22.1
  Top Layer w0.254: C3.2 104.825,83.312 110.617,77.52 110.617,76.881 111.252,76.246 114.566,76.246 114.566,71.674 113.042,70.15 J1.1
NetD1_2: D1.2 R1.1 | length 5.8
  Top Layer w0.254: R1.1 31.2,35.936 31.5,35.636 D1.2
NetD2_2: D2.2 R2.1 | length 5.8
  Top Layer w0.254: R2.1 37.48,35.948 37.767,35.662 D2.2
NetD3_2: D3.2 R3.1 | length 5.8
  Top Layer w0.254: R3.1 43.76,35.935 44.033,35.662 D3.2
NetD4_2: D4.2 R4.1 | length 5.8
  Top Layer w0.254: R4.1 50.04,35.922 50.3,35.662 D4.2
NetD5_2: D5.2 R5.1 | length 5.8
  Top Layer w0.254: R5.1 56.32,35.908 56.567,35.662 D5.2
NetD6_2: D6.2 R6.1 | length 5.9
  Top Layer w0.254: R6.1 62.6,35.997 62.833,35.763 D6.2
NetD7_2: D7.2 R7.1 | length 5.8
  Top Layer w0.254: R7.1 68.88,35.907 69.1,35.687 D7.2
NetD8_2: D8.2 R8.1 | length 5.8
  Top Layer w0.254: R8.1 75.16,33.986 75.367,33.779 D8.2
NetD9_2: D9.2 R9.1 | length 5.8
  Top Layer w0.254: R9.1 81.44,35.906 81.633,35.712 D9.2
NetD10_2: D10.2 R10.1 | length 5.8
  Top Layer w0.254: R10.1 87.72,35.892 87.9,35.712 D10.2
NetD11_2: D11.2 R11.1 | length 5.7
  Top Layer w0.254: R11.1 94,35.879 94.167,35.712 D11.2
NetD12_2: D12.2 R12.1 | length 5.7
  Top Layer w0.254: R12.1 100.28,35.866 100.433,35.712 D12.2
NetD13_2: D13.2 R13.1 | length 5.7
  Top Layer w0.254: R13.1 106.56,35.878 106.7,35.738 D13.2
NetD14_2: D14.2 R14.1 | length 5.7
  Top Layer w0.254: R14.1 112.84,35.864 112.967,35.738 D14.2
NetD15_2: D15.2 R15.1 | length 5.7
  Top Layer w0.254: R15.1 119.12,35.851 119.233,35.738 D15.2
NetD17_1: D17.1 R18.2 | length 8.3
  Top Layer w0.254: D17.1 74.486,75.844 77.699,75.844 78.654,76.8 R18.2
NetD18_1: D18.1 R19.2 | length 8.9
  Top Layer w0.254: D18.1 74.415,64.745 77.495,64.745 79.101,66.35 R19.2
NetD19_2: D19.2 K1.A2 Q1.3 | length 27.1
  Top Layer w0.254: K1.A2 57.113,59.913 D19.2
  Bottom Layer w0.254: D19.2 64.533,71.8 65.885,73.152 Q1.3
NetJ5_1: J5.1 K1.14 | length 9.4
  Top Layer w0.254: J5.1 30.7,70.398 31.4,69.698 K1.14
NetJ6_2: J6.2 Q2.3 | length 41.6
  Bottom Layer w0.254: J6.2 45.129,63.399 65.126,63.399 65.585,63.858 Q2.3
NetQ1_2: Q1.2 R20.2 | length 15.6
  Top Layer w0.254: v1(53.772,75.03) 53.772,78.74 54.032,79 R20.2
  Bottom Layer w0.254: v1(53.772,75.03) Q1.2
NetQ2_2: Q2.2 R21.2 | length 7.5
  Top Layer w0.254: Q2.2 64.1,60.755 64.2,60.655 R21.2
NetR1_2: R1.2 U1.15 | length 51.4
  Top Layer w0.254: R1.2 30.704,39.95 30.378,39.624 30.378,29.312 32.588,29.312 35.687,32.41 35.687,40.97 42.926,48.209 52.832,48.209 54.025,49.402 U1.15@54.025,52.54
NetR2_2: R2.2 U1.1 | length 19.7
  Top Layer w0.254: R2.2 37.48,41.834 42.357,46.711 52.755,46.711 U1.1@52.755,47.26
NetR3_2: R3.2 U1.2 | length 14.2
  Top Layer w0.254: R3.2 48.255,39.95 54.025,45.72 U1.2@54.025,47.26
NetR4_2: R4.2 U1.3 | length 11.7
  Top Layer w0.254: R4.2 53.848,39.95 55.295,41.397 U1.3@55.295,47.26
NetR5_2: R5.2 U1.4 | length 7.4
  Top Layer w0.254: R5.2 56.32,43.459 56.565,43.704 U1.4@56.565,47.26
NetR6_2: R6.2 U1.5 | length 9.1
  Top Layer w0.254: U1.5@57.835,47.26 57.835,45.314 62.6,40.549 R6.2
NetR7_2: R7.2 U1.6 | length 13.4
  Top Layer w0.254: U1.6@59.105,47.26 59.105,46.304 65.459,39.95 R7.2
NetR8_2: R8.2 U1.7 | length 20.9
  Top Layer w0.254: U1.7@60.375,47.26 60.375,46.838 v1(65.634,41.58) ; R8.2 v1(76.581,39.95)
  Bottom Layer w0.254: v1(65.634,41.58) 66.345,40.869 75.662,40.869 v1(76.581,39.95)
NetR9_2: R9.2 U2.15 | length 46.1
  Top Layer w0.254: v1(66.827,50.952) 67.025,51.15 U2.15 ; v1(74.27,45.542) 75.743,44.069 75.743,42.672 74.727,41.656 74.224,41.656 73.254,40.686 73.254,30.48 74.549,29.185 77.521,29.185 78.816,30.48 78.816,38.608 80.158,39.95 R9.2
  Bottom Layer w0.254: v1(66.827,50.952) 72.238,45.542 v1(74.27,45.542)
NetR10_2: R10.2 U2.1 | length 46.3
  Top Layer w0.254: U2.1 65.755,46.386 66.04,46.101 69.647,46.101 70.79,44.958 70.79,41.326 72.365,39.751 72.365,30.404 74.168,28.6 82.347,28.6 86.131,32.385 86.131,39.213 86.868,39.95 R10.2
NetR11_2: R11.2 U2.2 | length 60.2
  Top Layer w0.254: U2.2 67.025,47.752 66.314,48.463 65.532,48.463 64.999,47.93 64.999,46.279 65.684,45.593 69.215,45.593 70.275,44.533 70.275,40.361 71.679,38.957 71.679,29.312 73.152,27.838 90.78,27.838 92.405,29.464 92.405,38.883 93.472,39.95 R11.2
NetR12_2: R12.2 U2.3 | length 66.3
  Top Layer w0.254: U2.3 68.295,47.847 69.495,49.047 77.699,49.047 83.82,42.926 106.68,42.926 107.823,41.783 107.823,32.334 107.188,31.699 106.07,31.699 105.258,32.512 105.258,35.636 100.944,39.95 R12.2
NetR13_2: R13.2 U2.4 | length 41.6
  Top Layer w0.254: U2.4 69.565,47.823 70.282,48.539 76.657,48.539 83.414,41.783 102.159,41.783 103.992,39.95 R13.2
NetR14_2: R14.2 U2.5 | length 47.8
  Top Layer w0.254: U2.5 70.835,46.691 72.339,45.187 72.339,42.215 v1(72.466,42.088) ; R14.2 112.878,39.95 v1(112.878,41.427)
  Bottom Layer w0.254: v1(72.466,42.088) 112.217,42.088 v1(112.878,41.427)
NetR15_2: R15.2 U2.6 | length 70.3
  Top Layer w0.254: U2.6 72.105,47.752 72.384,48.031 75.158,48.031 82.27,40.919 94.945,40.919 96.698,39.167 96.698,30.48 97.866,29.312 114.097,29.312 114.656,29.87 114.656,38.782 115.824,39.95 R15.2
NetR16_2: R16.2 U2.7 | length 56.9
  Top Layer w0.254: U2.7 73.375,46.4 72.854,45.879 72.854,45.053 v1(74.727,43.18) ; v1(120.417,43.18) 123.647,39.95 R16.2
  Bottom Layer w0.254: v1(74.727,43.18) v1(120.417,43.18)
NetU1_9: U1.9 U2.14 | length 7.9
  Top Layer w0.254: U1.9@61.645,52.54 61.645,52.527 63.5,52.527 64.262,53.289 68.295,53.289 U2.14
"Red LED": R19.1 U4.13 | length 33.7
  Top Layer w0.254: R19.1 80.9,59.308 84.76,55.448 84.76,48.614 85.344,48.03 U4.13
Reset: C3.1 U4.1 | length 7.8
  Top Layer w0.254: U4.1 102.775,81.095 C3.1
RXD: J1.3 U4.2 | length 13.1
  Top Layer w0.254: U4.2 101.433,74.727 109.931,74.727 110.434,75.23 J1.3
SCL: J3.3 U4.28 | length 49.9
  Bottom Layer w0.254: J3.3 75.67,86.992 92.913,69.748 100.965,69.748 104.8,73.584 104.8,75.5 U4.28
SDA: J3.2 U4.27 | length 70.2
  Bottom Layer w0.254: J3.2 76.94,91.618 77.448,91.11 115.281,91.11 118.872,94.701 119.888,94.701 120.501,94.088 120.501,92.964 116.815,89.278 116.815,84.975 U4.27
"Servo Button": SW1.3 U4.5 | length 55.6
  Bottom Layer w0.254: U4.5 101.127,68.35 107.453,74.676 113.106,74.676 125.019,86.589 125.019,94.767 124.069,95.717 113.017,95.717 SW1.3
"Servo Motor": J4.2 U4.15 | length 8.7
  Bottom Layer w0.254: U4.15 110.24,45.49 J4.2
Temperature: R17.1 U4.12 U5.2 | length 50.1
  Top Layer w0.254: U4.12 101.829,52.209 101.829,58.445 100.838,59.436 99.508,59.436 99,59.944 R17.1 98.552,87.7 98.171,88.081 98.171,89.764 102.555,89.764 103.8,91.008 U5.2
TXD: J1.2 U4.3 | length 13.1
  Top Layer w0.254: U4.3 101.433,72.187 109.931,72.187 110.434,72.69 J1.2
"Water Pump": R21.1 U4.11 | length 48
  Top Layer w0.254: v1(61.417,61.214) 61.417,57 R21.1
  Bottom Layer w0.254: v1(61.417,61.214) 62.459,62.255 91.045,62.255 U4.11
XTAL1: C4.2 U4.9 Y1.2 | length 14.1
  Top Layer w0.254: Y1.2 88.75,60.477 93.472,60.477 94.6,59.349 C4.2 99.5,57.5 U4.9
XTAL2: C5.2 U4.10 Y1.1 | length 34.7
  Top Layer w0.254: Y1.1 87.2,61.976 86.362,62.814 86.307,62.814 85.469,61.976 85.469,49.632 85.901,49.2 94.37,49.2 94.7,49.53 C5.2 94.7,50.996 98.552,54.848 99.388,54.848 U4.10
pads on no net: K1.12 SW1.2 SW1.4 SW2.2 SW2.4 U2.9 U4.18 U4.21 U4.23 U4.24 U4.25 U4.26
copper on no net: | length 354
  Top Layer w0.254: 25.7,27.87 ccw(c26.97,27.87) 26.97,26.6 129.13,26.6 ccw(c129.13,27.87) 130.4,27.87 130.4,98.73 ccw(c129.13,98.73) 129.13,100 31.2,100 26.97,100 ccw(c26.97,98.73) 25.7,98.73 25.7,27.87

## Text inside footprints (layer, text, board x,y; h text height)
D17: Top Overlay "+" at 70.45,76.77 h0.8
D18: Top Overlay "+" at 71.38,65.65 h0.8